# Altium PCB Testboard.PcbDoc (part 2 of 2)
Units mil, origin at the board's own origin, x right, y up, seen from the top; angles counter-clockwise.
Board outline 5500 x 5000 mil, 4 copper layers (Top layer, Inner Layer 1, Inner Layer 2, Bottom Layer), stack 13.956 mil thick; 71 components, 75 nets, 1162 pads, 400 vias.
Unrouted connection lines stored in the file: 423.
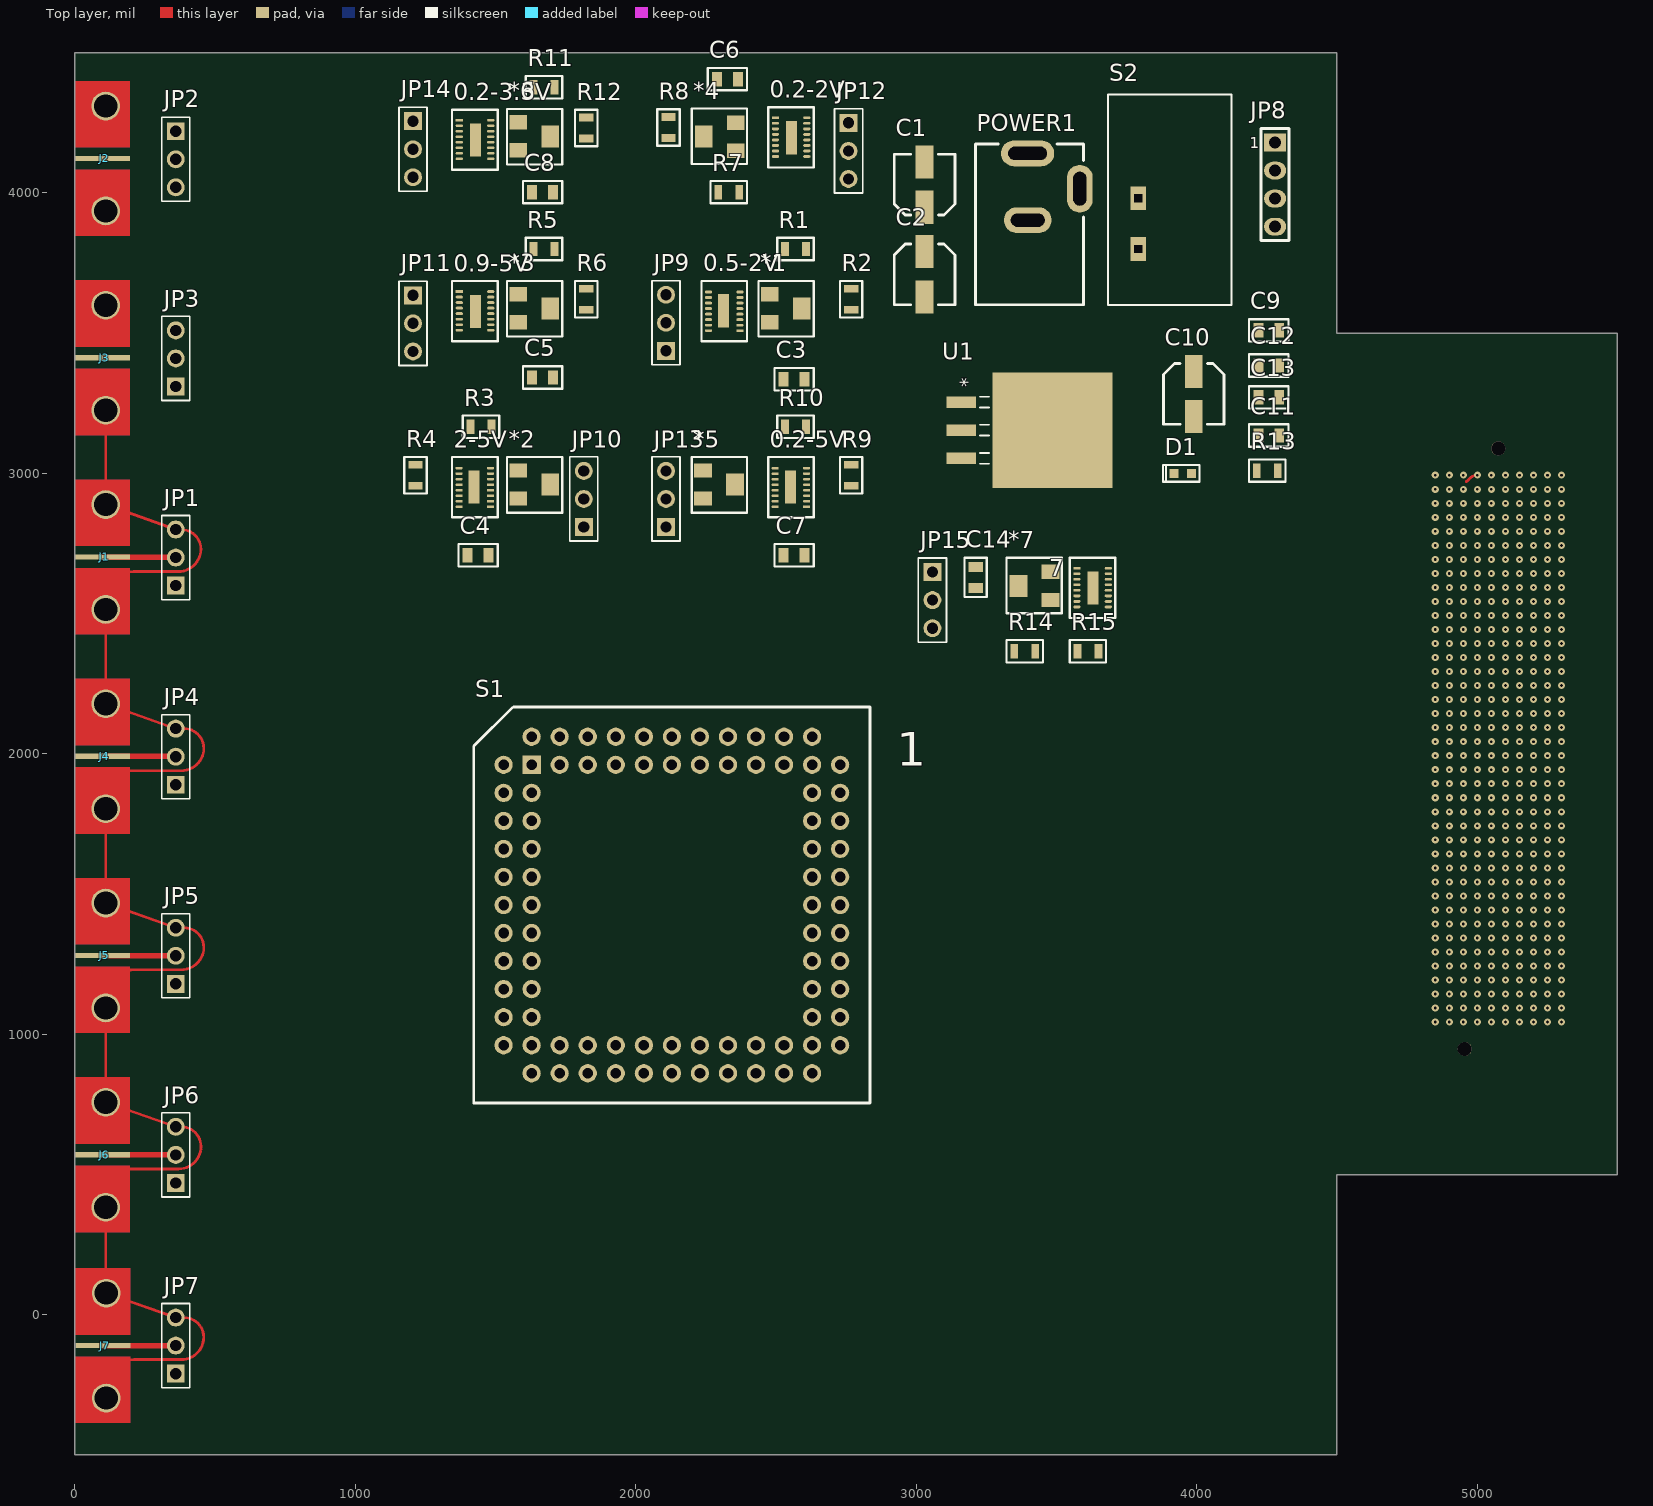
[diagram p0: Top layer view]

## Via types
v1: diameter 25, hole 10, Top layer to Bottom Layer, 399 vias
v2: diameter 25, hole 10, Top layer to Bottom Layer, tented both sides, 1 vias

## Nets (pads, with @x,y where several pads share a name; then routed paths per layer and width w, separated by ;. In a path a pad name is that pad's centre, name@x,y a point inside that pad or via, vN(x,y) a via of type N, cw(c..) or ccw(c..) an arc to the next point about the centre after c; other vN are vias at no path point) (continued)
pads on no net: 0.2-2V.1 0.2-2V.2 0.2-2V.8 0.2-2V.15 0.2-2V.16 0.2-3.3V.1 0.2-3.3V.2 0.2-3.3V.4 0.2-3.3V.8 0.2-3.3V.15 0.2-3.3V.16 0.2-5V.1 0.2-5V.2 0.2-5V.8 0.2-5V.15 0.2-5V.16 0.5-2V.1 0.5-2V.2 0.5-2V.8 0.5-2V.15 0.5-2V.16 0.9-5V.1 0.9-5V.2 0.9-5V.8 0.9-5V.15 0.9-5V.16 2-5V.1 2-5V.2 2-5V.8 2-5V.15 2-5V.16 7.1 7.2 7.4 7.8 7.15 7.16 "FMC HPC1." "FMC HPC1.A2" "FMC HPC1.A3" "FMC HPC1.A6" "FMC HPC1.A7" "FMC HPC1.A10" "FMC HPC1.A11" "FMC HPC1.A14" "FMC HPC1.A15" "FMC HPC1.A18" "FMC HPC1.A19" "FMC HPC1.A22" "FMC HPC1.A23" "FMC HPC1.A26" "FMC HPC1.A27" "FMC HPC1.A30" "FMC HPC1.A31" "FMC HPC1.A34" "FMC HPC1.A35" "FMC HPC1.A38" "FMC HPC1.A39" "FMC HPC1.B1" "FMC HPC1.B4" "FMC HPC1.B5" "FMC HPC1.B8" "FMC HPC1.B9" "FMC HPC1.B12" "FMC HPC1.B13" "FMC HPC1.B16" "FMC HPC1.B17" "FMC HPC1.B20" "FMC HPC1.B21" "FMC HPC1.B24" "FMC HPC1.B25" "FMC HPC1.B28" "FMC HPC1.B29" "FMC HPC1.B32" "FMC HPC1.B33" "FMC HPC1.B36" "FMC HPC1.B37" "FMC HPC1.B40" "FMC HPC1.C2" "FMC HPC1.C3" "FMC HPC1.C6" "FMC HPC1.C7" "FMC HPC1.C23" "FMC HPC1.C26" "FMC HPC1.C27" "FMC HPC1.C30" "FMC HPC1.C31" "FMC HPC1.C34" "FMC HPC1.C35" "FMC HPC1.C37" "FMC HPC1.C39" "FMC HPC1.D1" "FMC HPC1.D4" "FMC HPC1.D5" "FMC HPC1.D15" "FMC HPC1.D17" "FMC HPC1.D18" "FMC HPC1.D20" "FMC HPC1.D21" "FMC HPC1.D23" "FMC HPC1.D24" "FMC HPC1.D26" "FMC HPC1.D27" "FMC HPC1.D29" "FMC HPC1.D30" "FMC HPC1.D31" "FMC HPC1.D32" "FMC HPC1.D33" "FMC HPC1.D34" "FMC HPC1.D35" "FMC HPC1.D36" "FMC HPC1.D38" "FMC HPC1.D40" "FMC HPC1.E9" "FMC HPC1.E10" "FMC HPC1.E12" "FMC HPC1.E13" "FMC HPC1.E15" "FMC HPC1.E16" "FMC HPC1.E18" "FMC HPC1.E19" "FMC HPC1.E21" "FMC HPC1.E22" "FMC HPC1.E24" "FMC HPC1.E25" "FMC HPC1.E27" "FMC HPC1.E28" "FMC HPC1.E30" "FMC HPC1.E31" "FMC HPC1.E33" "FMC HPC1.E34" "FMC HPC1.E36" "FMC HPC1.E37" "FMC HPC1.E39" "FMC HPC1.F1" "FMC HPC1.F22" "FMC HPC1.F23" "FMC HPC1.F25" "FMC HPC1.F26" "FMC HPC1.F28" "FMC HPC1.F29" "FMC HPC1.F31" "FMC HPC1.F32" "FMC HPC1.F34" "FMC HPC1.F35" "FMC HPC1.F37" "FMC HPC1.F38" "FMC HPC1.F40" "FMC HPC1.G2" "FMC HPC1.G3" "FMC HPC1.G6" "FMC HPC1.G7" "FMC HPC1.G9" "FMC HPC1.G10" "FMC HPC1.G12" "FMC HPC1.G13" "FMC HPC1.G15" "FMC HPC1.G16" "FMC HPC1.G18" "FMC HPC1.G19" "FMC HPC1.G21" "FMC HPC1.G22" "FMC HPC1.G24" "FMC HPC1.G25" "FMC HPC1.G27" "FMC HPC1.G28" "FMC HPC1.G30" "FMC HPC1.G31" "FMC HPC1.G33" "FMC HPC1.G34" "FMC HPC1.G36" "FMC HPC1.G37" "FMC HPC1.G39" "FMC HPC1.H1" "FMC HPC1.H2" "FMC HPC1.H4" "FMC HPC1.H5" "FMC HPC1.H7" "FMC HPC1.H8" "FMC HPC1.H10" "FMC HPC1.H11" "FMC HPC1.H13" "FMC HPC1.H14" "FMC HPC1.H16" "FMC HPC1.H17" "FMC HPC1.H19" "FMC HPC1.H20" "FMC HPC1.H22" "FMC HPC1.H23" "FMC HPC1.H25" "FMC HPC1.H26" "FMC HPC1.H28" "FMC HPC1.H29" "FMC HPC1.H31" "FMC HPC1.H32" "FMC HPC1.H34" "FMC HPC1.H35" "FMC HPC1.H37" "FMC HPC1.H38" "FMC HPC1.H40" "FMC HPC1.J2" "FMC HPC1.J3" "FMC HPC1.J6" "FMC HPC1.J7" "FMC HPC1.J9" "FMC HPC1.J10" "FMC HPC1.J12" "FMC HPC1.J13" "FMC HPC1.J15" "FMC HPC1.J16" "FMC HPC1.J18" "FMC HPC1.J19" "FMC HPC1.J21" "FMC HPC1.J22" "FMC HPC1.J24" "FMC HPC1.J25" "FMC HPC1.J27" "FMC HPC1.J28" "FMC HPC1.J30" "FMC HPC1.J31" "FMC HPC1.J33" "FMC HPC1.J34" "FMC HPC1.J36" "FMC HPC1.J37" "FMC HPC1.J39" "FMC HPC1.K1" "FMC HPC1.K2" "FMC HPC1.K4" "FMC HPC1.K5" "FMC HPC1.K7" "FMC HPC1.K8" "FMC HPC1.K10" "FMC HPC1.K11" "FMC HPC1.K13" "FMC HPC1.K14" "FMC HPC1.K16" "FMC HPC1.K17" "FMC HPC1.K19" "FMC HPC1.K20" "FMC HPC1.K22" "FMC HPC1.K23" "FMC HPC1.K25" "FMC HPC1.K26" "FMC HPC1.K28" "FMC HPC1.K29" "FMC HPC1.K31" "FMC HPC1.K32" "FMC HPC1.K34" "FMC HPC1.K35" "FMC HPC1.K37" "FMC HPC1.K38" "FMC HPC1.K40" C1.2 C2.2 JP8.1 JP13.3 S1.3 S1.4 S1.5 S1.6 S1.7 S1.8 S1.9 S1.10 S1.11 S1.12 S1.13 S1.14 S1.25 S1.31 S1.33 S1.34 S1.51 S1.52 S1.53 S1.54 S1.55 S1.72 S1.73 S1.74 S1.75
copper on no net:
  other v1: 4851,1043.49 4851,1143.49 4851,1193.49 4851,1343.49 4901,1393.49 5001,1393.49 5101,1393.49 5151,1393.49 5251,1393.49 4851,1443.49 4951,1443.49 5051,1443.49 5151,1443.49 5251,1443.49 4851,1493.49 4901,1493.49 4951,1493.49 5001,1493.49 5051,1493.49 5101,1493.49 5151,1493.49 5201,1493.49 5301,1493.49 4901,1543.49 5001,1543.49 5101,1543.49 5151,1543.49 5201,1543.49 5301,1543.49 4851,1593.49 4951,1593.49 5051,1593.49 5151,1593.49 5251,1593.49 4851,1643.49 4901,1643.49 4951,1643.49 5001,1643.49 5051,1643.49 5101,1643.49 5251,1643.49 4901,1693.49 5001,1693.49 5101,1693.49 5151,1693.49 5201,1693.49 5301,1693.49 4851,1743.49 4951,1743.49 5051,1743.49 5151,1743.49 5201,1743.49 5301,1743.49 4851,1793.49 4901,1793.49 4951,1793.49 5001,1793.49 5051,1793.49 5101,1793.49 5251,1793.49 4901,1843.49 5001,1843.49 5101,1843.49 5151,1843.49 5251,1843.49 4851,1893.49 4951,1893.49 5051,1893.49 5151,1893.49 5201,1893.49 5301,1893.49 4851,1943.49 4901,1943.49 4951,1943.49 5001,1943.49 5051,1943.49 5101,1943.49 5301,1943.49 4901,1993.49 5001,1993.49 5101,1993.49 5151,1993.49 5251,1993.49 4851,2043.49 4951,2043.49 5151,2043.49 5251,2043.49 4851,2093.49 4901,2093.49 4951,2093.49 5001,2093.49 5101,2093.49 5301,2093.49 4901,2143.49 5001,2143.49 5101,2143.49 5151,2143.49 5301,2143.49 4851,2193.49 4951,2193.49 5151,2193.49 5251,2193.49 4851,2243.49 4901,2243.49 4951,2243.49 5001,2243.49 5101,2243.49 5251,2243.49 4901,2293.49 5001,2293.49 5101,2293.49 5151,2293.49 5301,2293.49 4851,2343.49 4951,2343.49 5301,2343.49 4851,2393.49 4901,2393.49 4951,2393.49 5001,2393.49 5101,2393.49 5251,2393.49 4901,2443.49 5001,2443.49 5101,2443.49 5251,2443.49 4851,2493.49 4951,2493.49 5301,2493.49 4851,2543.49 4901,2543.49 4951,2543.49 5001,2543.49 5101,2543.49 5301,2543.49 4901,2593.49 5001,2593.49 5101,2593.49 5251,2593.49 4851,2643.49 4951,2643.49 5251,2643.49 4851,2693.49 4901,2693.49 4951,2693.49 5001,2693.49 5201,2693.49 5301,2693.49 4901,2743.49 5001,2743.49 5201,2743.49 5301,2743.49 4851,2793.49 4951,2793.49 5151,2793.49 5251,2793.49 4851,2843.49 4951,2843.49 5151,2843.49 5251,2843.49 4901,2893.49 5001,2893.49 5201,2893.49 5301,2893.49 4851,2943.49 4901,2943.49 4951,2943.49 5001,2943.49 5201,2943.49 5301,2943.49 4851,2993.49 4951,2993.49 5051,2993.49 5151,2993.49 5251,2993.49
  other v2: 4851,1293.49

## Text inside footprints (layer, text, board x,y; h text height)
J1: Mechanical 3 "Board Edge" at -9.18,2303.61 h7.87 r90
J2: Mechanical 3 "Board Edge" at -9.18,3724.61 h7.87 r90
J3: Mechanical 3 "Board Edge" at -9.18,3014.11 h7.87 r90
J4: Mechanical 3 "Board Edge" at -9.18,1593.11 h7.87 r90
J5: Mechanical 3 "Board Edge" at -9.18,882.61 h7.87 r90
J6: Mechanical 3 "Board Edge" at -9.18,172.11 h7.87 r90
J7: Mechanical 3 "Board Edge" at -7.36,-508.39 h7.87 r90
JP8: Top Overlay "1" at 4190,4160 h39.37
S1: Top Overlay "1" at 2930,1958 h120
U1: Top Overlay "*" at 3136,3341.5 h50 r270; Mechanical 13 "*" at 3272,3266.5 h50 r270